# Allegro board newBoard.brd
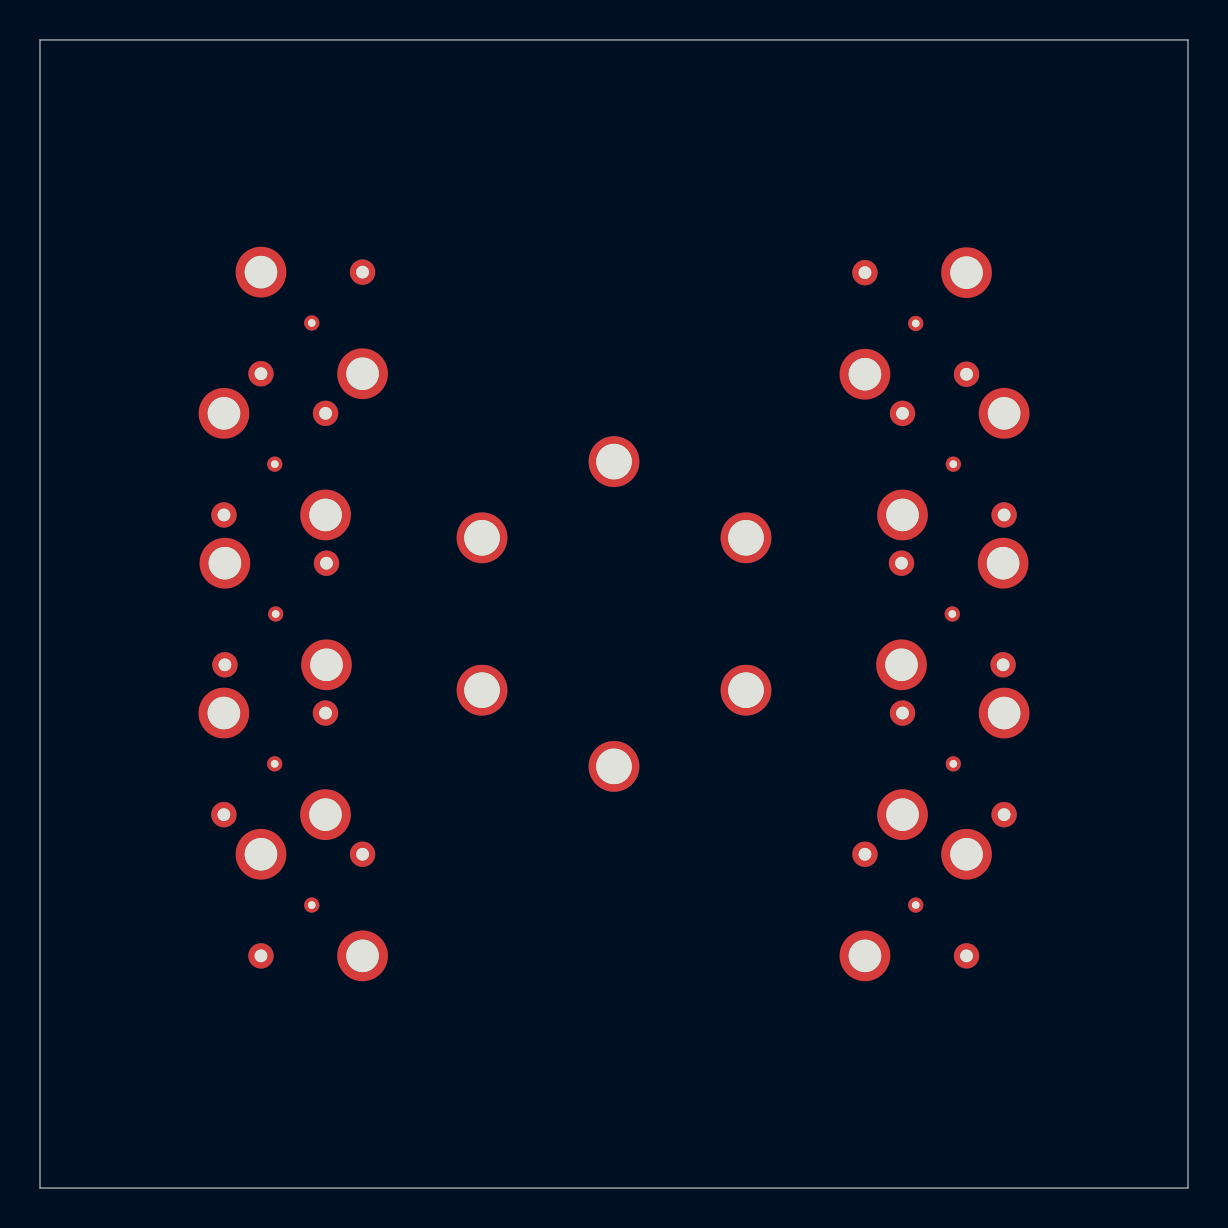
[diagram p0: board, top side]
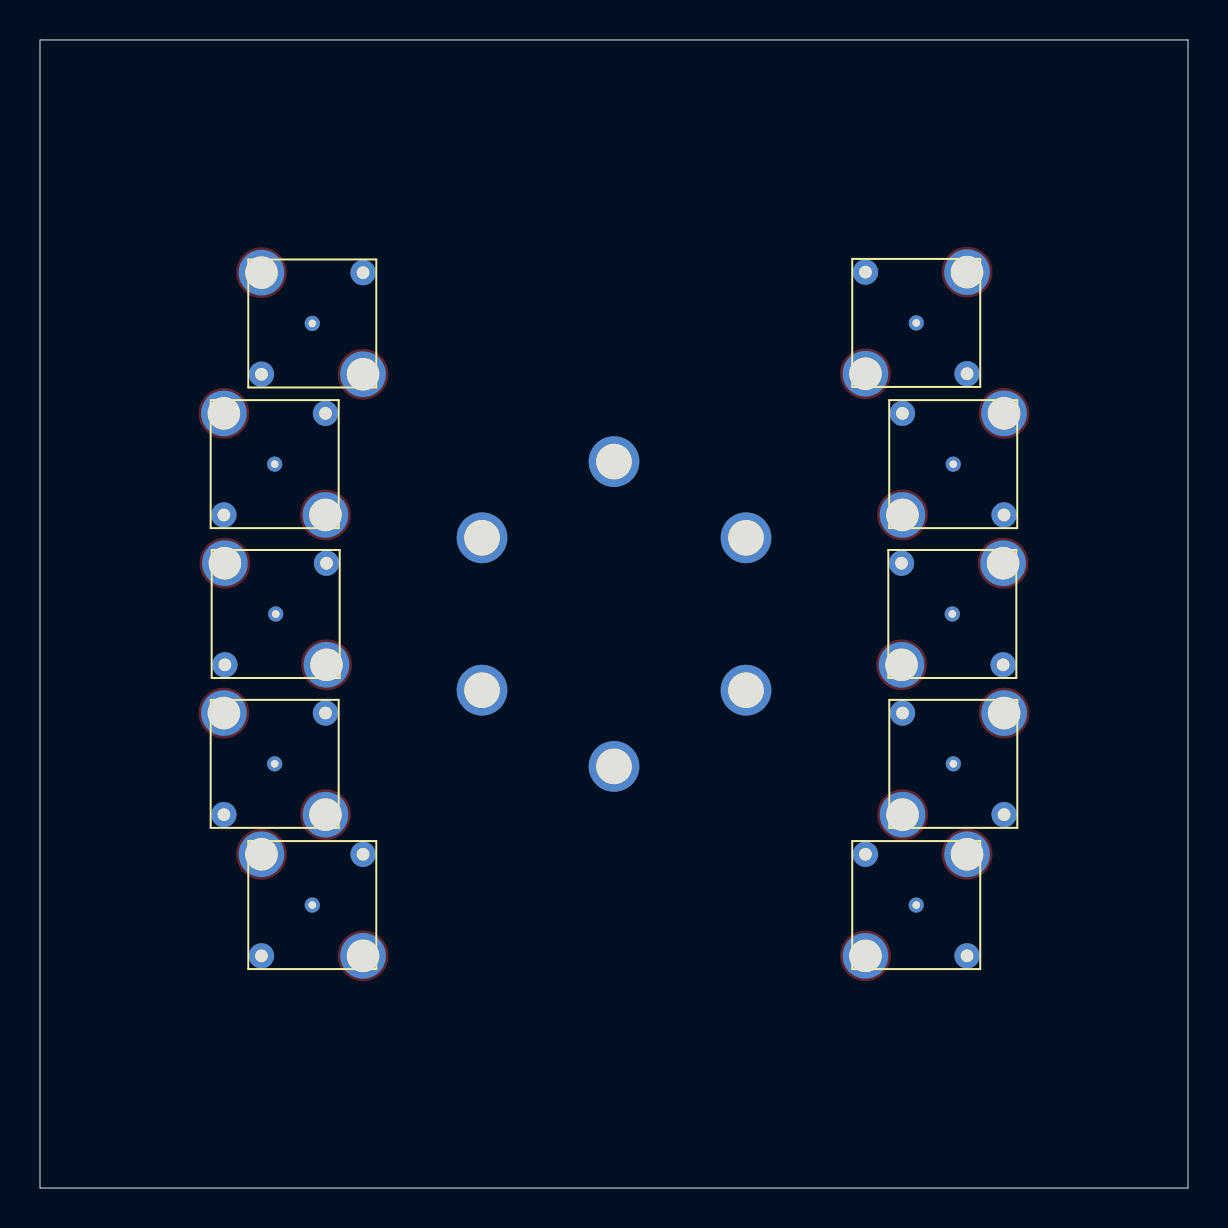
[diagram p1: board, bottom side, seen from below]

Outline 57.4 x 57.4 mm; copper layers: TOP, 02_GND, 03_SIG, BOTTOM. Coordinates in mm from the lower left corner of the outline.
Outline path: 0,57.4 57.4,57.4 57.4,0 0,0 0,57.4

## Placement (name value [footprint] x y rotation side)
J1  -  [SSMA_BB]  11.79 28.7 90 bottom
J2  -  [SSMA_BB]  45.62 28.7 180 bottom
J3  -  [SSMA_BB]  11.73 21.21 90 bottom
J4  -  [SSMA_BB]  45.67 21.21 180 bottom
J5  -  [SSMA_BB]  11.74 36.2 90 bottom
J6  -  [SSMA_BB]  45.67 36.2 180 bottom
J7  -  [SSMA_BB]  13.59 14.15 90 bottom
J8  -  [SSMA_BB]  43.79 14.15 180 bottom
J9  -  [SSMA_BB]  13.59 43.26 90 bottom
J10  -  [SSMA_BB]  43.79 43.23 180 bottom
MTG1  -  [HOLE070P]  28.7 36.32 0 top
MTG2  -  [HOLE070P]  35.3 32.51 300 top
MTG3  -  [HOLE070P]  35.3 24.89 240 top
MTG4  -  [HOLE070P]  28.7 21.08 180 top
MTG5  -  [HOLE070P]  22.1 24.89 120 top
MTG6  -  [HOLE070P]  22.1 32.51 60 top

## Library data of the parts
J1-J10 = SSMA_BB
MTG1-MTG6 = HOLE070P

## Footprints (pads in the part's own frame, mm; a bottom-side part is the same pattern mirrored in y, then rotated)
HOLE070P
  round 2.54 hole 1.778: 1(0,0)
SSMA_BB
  round 1.27 hole 0.635: (-2.54,-2.54) (2.54,2.54)
  round 0.762 hole 0.381: 1(0,0)
  round 2.54 hole 1.626: 2(-2.54,2.54) 3(2.54,-2.54)

## Nets
GND: J1.2(TP-2) J1.3(TP-3) J2.2(TP-2) J2.3(TP-3) J3.2(TP-2) J3.3(TP-3) J4.2(TP-2) J4.3(TP-3) J5.2(TP-2) J5.3(TP-3) J6.2(TP-2) J6.3(TP-3) J7.2(TP-2) J7.3(TP-3) J8.2(TP-2) J8.3(TP-3) J9.2(TP-2) J9.3(TP-3) J10.2(TP-2) J10.3(TP-3) MTG1.1(TP-1) MTG2.1(TP-1) MTG3.1(TP-1) MTG4.1(TP-1) MTG5.1(TP-1) MTG6.1(TP-1)
MICROWAVE: J1.1(TP-1) J2.1(TP-1) J3.1(TP-1) J4.1(TP-1) J5.1(TP-1) J6.1(TP-1) J7.1(TP-1) J8.1(TP-1) J9.1(TP-1) J10.1(TP-1)
